# EAGLE board StepDrv1 (EAGLE 7.2.0)
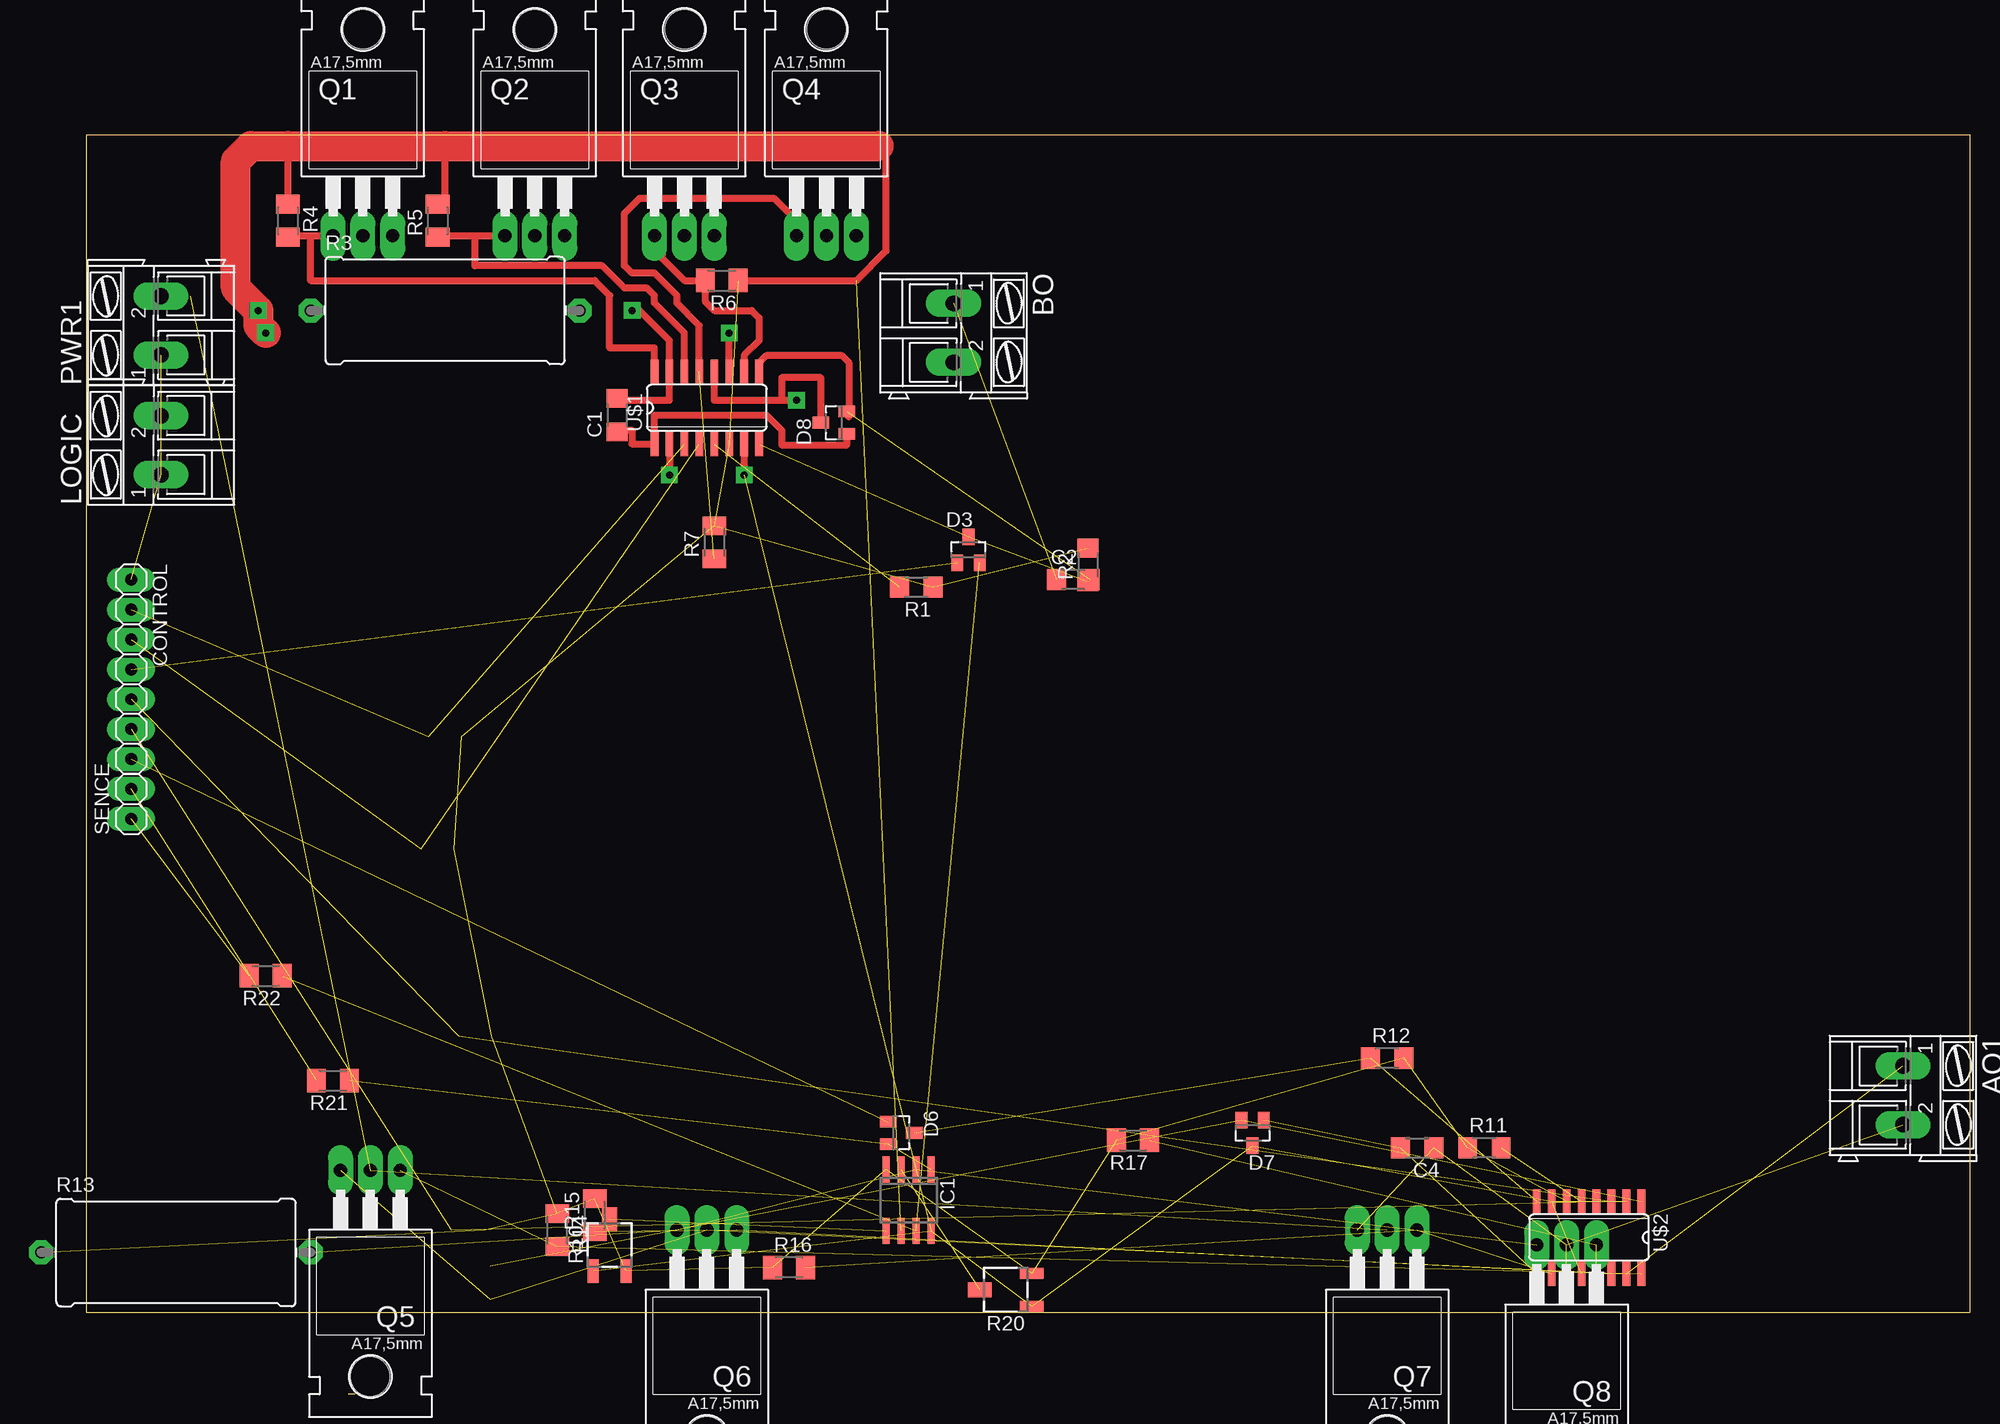
[diagram p0: board, top side]
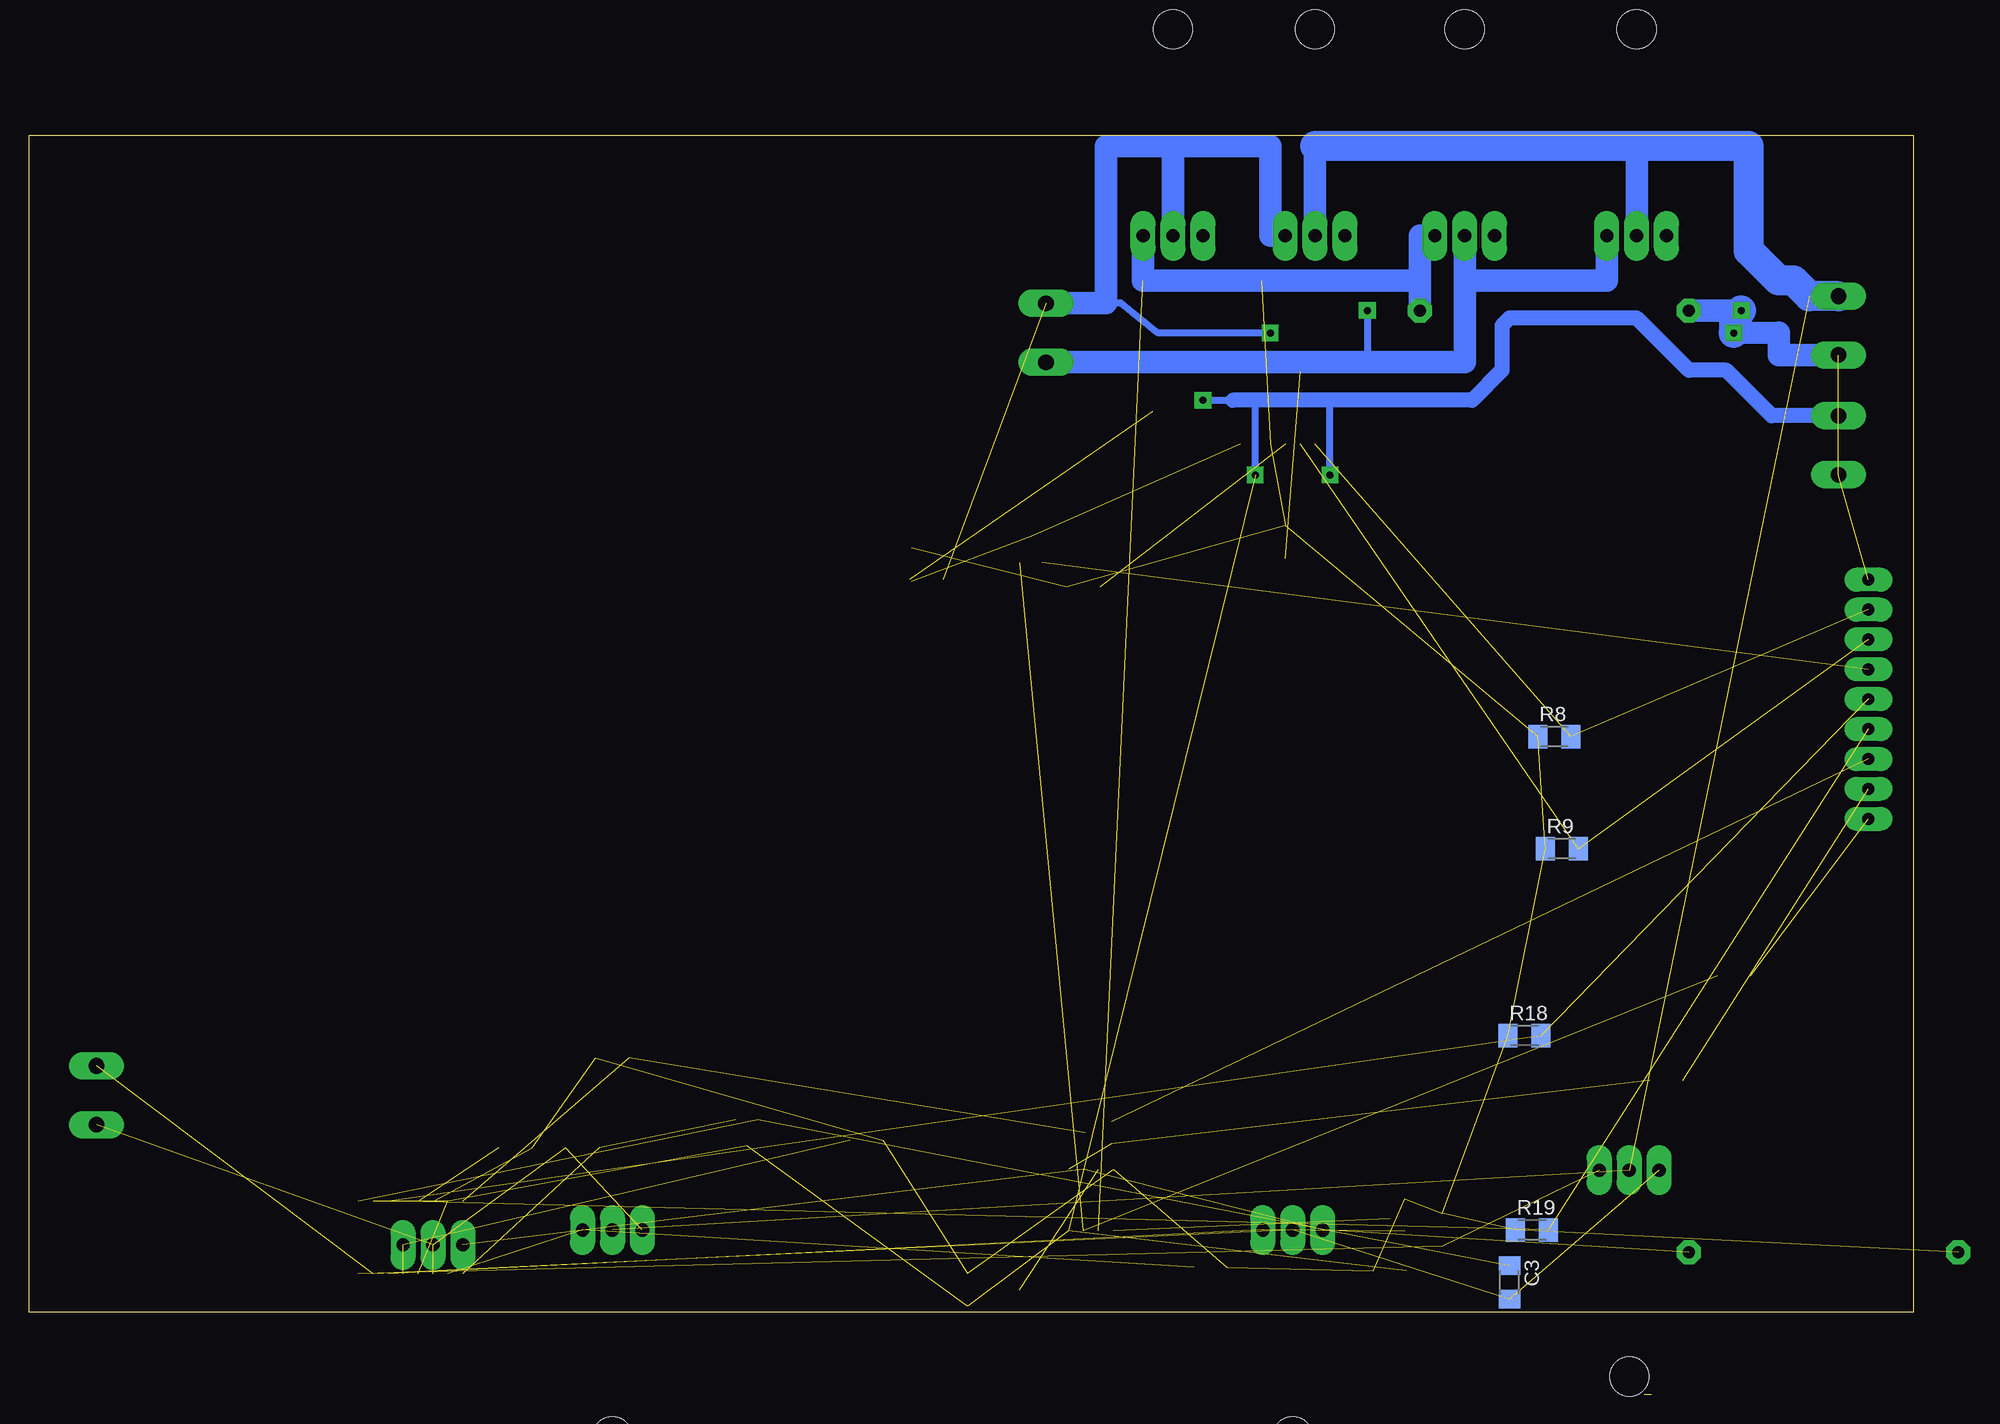
[diagram p1: board, bottom side, seen from below]

Size 160 x 106.98 mm. Coordinates in mm from the lower left corner, seen from the top.
Outline: 22.86,0 22.23,0
Outline: 0,6.99 160,6.99 160,106.98 0,106.98 0,6.99
Copper layers (1*16): Top 0.035mm / dielectric 1.5mm / Bottom 0.035mm
Design rules "default *": minimum track width 10mil, minimum drill 24mil, track to track 8mil, track to pad 8mil, pad to pad 8mil, via to via 8mil, smd to smd 8mil, copper to edge 40mil, drill to drill 8mil, minimum pad ring 20mil, minimum via ring 16mil, stop-mask expansion 4mil, vias tented up to drill 0mil, thermal gap 10mil

## Footprints (pad centres in the part's own frame; a part is rotated, then mirrored left to right if it is on the bottom)
AK300/2 = drill 1.321 long: 1 -2.515,0; 2 2.489,0
C1206 = smd 1.6 x 1.803: 1 -1.422,0; 2 1.422,0
1X07 = drill 1.016 long: 1 -7.62,0; 2 -5.08,0; 3 -2.54,0; 4 0,0; 5 2.54,0; 6 5.08,0; 7 7.62,0
SOT23 = smd 1 x 1.4: 1 -0.95,-1.1; 2 0.95,-1.1; 3 0,1.1
SO08 = smd 0.6 x 2.2: 1 -1.905,-2.6; 2 -0.635,-2.6; 3 0.635,-2.6; 4 1.905,-2.6; 5 1.905,2.6; 6 0.635,2.6; 7 -0.635,2.6; 8 -1.905,2.6
TO220BH = drill 1.118 long: D 0,-6.35; G -2.54,-6.35; S 2.54,-6.35 | hole 3.302: 0,11.176
R1206 = smd 1.6 x 1.803: 1 -1.422,0; 2 1.422,0
0922/22 = drill 1.016 octagon: 1 -11.43,0; 2 11.43,0
M1206 = smd 1.6 x 2: 1 -1.4,0; 2 1.4,0
3223G = smd 2 x 0.9: 1 -2.2,1.4; 3 -2.2,-1.4 | smd 2 x 1.3: 2 2.2,0
1X02 = drill 1.016 long: 1 -1.27,0; 2 1.27,0
SO16 = smd 0.66 x 2.032: 1 -4.445,-3.073; 2 -3.175,-3.073; 3 -1.905,-3.073; 4 -0.635,-3.073; 5 0.635,-3.073; 6 1.905,-3.073; 7 3.175,-3.073; 8 4.445,-3.073; 9 4.445,3.073; 10 3.175,3.073; 11 1.905,3.073; 12 0.635,3.073; 13 -0.635,3.073; 14 -1.905,3.073; 15 -3.175,3.073; 16 -4.445,3.073

## Placement (x,y rotation side)
AO1  OUT  [AK300/2]  154.31,25.4 270 top
BO  OUT  [AK300/2]  73.66,90.17 270 top
C1  2.2uF  [C1206]  45.09,83.19 90 top
C2  2.2uF  [C1206]  83.82,69.22 0 top
C3  2.2uF  [C1206]  34.29,9.53 270 bottom
C4  2.2uF  [C1206]  113.03,20.96 180 top
CONTROL  [1X07]  3.81,61.59 270 top
D3  HSMS-2854  [SOT23]  74.93,71.75 0 top
D6  HSMS-2854  [SOT23]  69.22,22.23 270 top
D7  HSMS-2853  [SOT23]  99.06,22.23 180 top
D8  HSMS-2853  [SOT23]  63.5,82.55 90 top
IC1  LM358D  [SO08]  69.85,16.51 180 top
LOGIC  12V  [AK300/2]  6.35,80.64 90 top
PWR1  [AK300/2]  6.35,90.8 90 top
Q1  IRFZ48Z  [TO220BH]  23.5,104.78 0 top
Q2  IRFZ48Z  [TO220BH]  38.1,104.78 0 top
Q3  IRFZ48Z  [TO220BH]  50.8,104.78 0 top
Q4  IRFZ48Z  [TO220BH]  62.87,104.78 0 top
Q5  IRFZ48Z  [TO220BH]  24.13,12.7 180 top
Q6  IRFZ48Z  [TO220BH]  52.7,7.62 180 top
Q7  IRFZ48Z  [TO220BH]  110.49,7.62 180 top
Q8  IRFZ48Z  [TO220BH]  125.73,6.35 180 top
R1  [R1206]  70.48,68.58 180 top
R2  [R1206]  85.09,70.48 90 top
R3  [0922/22]  30.48,92.08 0 top
R4  [M1206]  17.14,99.69 270 top
R5  [M1206]  29.84,99.69 90 top
R6  [M1206]  53.98,94.61 180 top
R7  [M1206]  53.34,72.39 90 top
R8  [M1206]  30.48,55.88 0 bottom
R9  [M1206]  29.84,46.35 0 bottom
R10  [3223G]  44.45,12.7 90 top
R11  [R1206]  118.75,20.96 0 top
R12  [R1206]  110.49,28.57 0 top
R13  [0922/22]  7.62,12.07 0 top
R14  [M1206]  40.01,13.97 270 top
R15  [M1206]  43.18,15.24 90 top
R16  [M1206]  59.69,10.79 0 top
R17  [M1206]  88.9,21.59 180 top
R18  [M1206]  33.02,30.48 0 bottom
R19  [M1206]  32.38,13.97 0 bottom
R20  [3223G]  78.11,8.89 180 top
R21  [M1206]  20.95,26.67 180 top
R22  [M1206]  15.24,35.56 180 top
SENCE  [1X02]  3.81,50.16 90 top
U$1  HIP4082IBZT  [SO16]  52.7,83.82 0 top
U$2  HIP4082IBZT  [SO16]  127.64,13.34 180 top

## Library data of the parts
AO1 BO LOGIC PWR1 = con-ptr500; OC_FARNELL: unknown; OC_NEWARK: unknown
C1-C4 = dp_devices
CONTROL SENCE = pinhead
D3 D6-D8 = avago
IC1 = linear
Q1-Q8 = transistor-power
R1-R9 R11-R19 R21 R22 = rcl
R10 R20 = pot
U$1 U$2 = mosfet_drivers

## Nets
N$1: C2.2 D8.2 U$1.9
N$2: D3.3 R2.1 U$1.8
N$3: C1.1 D8.1 U$1.1
N$4: BO.2 C1.2 Q1.S Q2.D U$1.15
N$5: CONTROL.4 D3.1
N$6: R1.2 U$1.5
N$7: R21.2 SENCE.2
N$8: BO.1 C2.1 Q3.S Q4.D U$1.11
N$9: CONTROL.3 R9.2 U$1.4
N$10: CONTROL.2 R8.2 U$1.3
N$11: IC1.6 Q2.S Q4.S R3.2
N$12: Q1.G R4.2 U$1.16
N$13: Q2.G R5.1 U$1.14
N$14: Q3.G R6.2 U$1.10
N$15: Q4.G R7.1 U$1.13
N$16: D3.2 IC1.7 R22.1
N$18: IC1.5 R10.2
N$19: C4.2 D7.1 U$2.9
N$20: C3.1 D7.2 U$2.1
N$21: AO1.1 C3.2 Q5.S Q6.D U$2.15
N$23: CONTROL.7 D6.1
N$24: R11.2 U$2.5
N$25: AO1.2 C4.1 Q7.S Q8.D U$2.11
N$26: IC1.2 Q6.S Q8.S R13.2
N$27: Q5.G R14.2 U$2.16
N$28: Q6.G R15.1 U$2.14
N$29: Q7.G R16.2 U$2.10
N$30: Q8.G R17.1 U$2.13
N$31: CONTROL.6 R19.2 U$2.4
N$32: CONTROL.5 R18.2 U$2.3
N$33: R22.2 SENCE.1
N$34: D6.3 R12.1 U$2.8
N$35: D6.2 IC1.1 R21.1
N$36: IC1.3 R20.2
N$37: PWR1.2 Q1.D Q3.D Q5.D Q7.D
N$38: CONTROL.1 IC1.4 LOGIC.1 PWR1.1 R1.1 R2.2 R3.1 R4.1 R5.2 R6.1 R7.2 R8.1 R9.1 R10.3 R11.1 R12.2 R13.1 R14.1 R15.2 R16.1 R17.2 R18.1 R19.1 R20.3 U$1.6 U$2.6
N$39: D7.3 D8.3 IC1.8 LOGIC.2 R10.1 R20.1 U$1.2 U$1.7 U$1.12 U$2.2 U$2.7 U$2.12

## Tracks (layer width: path | path; a pad name or v marks a point on that pad's centre or on a via)
N$1  (1 unrouted)
  Top 0.61: U$1.9 57.15,87.63 57.78,88.27 64.14,88.27 64.77,87.63 64.77,83.03 D8.2
N$2  (2 unrouted)
N$3
  Top 0.61: C1.1 45.09,81.92 46.35,81.92 46.35,80.75 U$1.1 48.26,83.19 57.78,83.19 59.05,81.92 59.05,80.64 64.6,80.64 D8.1
N$4  (via drill 0.6)
  Top 0.61: v46.35,92.08 46.99,92.08 49.53,89.53 U$1.15 49.53,84.45 45.09,84.45 C1.2
  Bottom 0.61: v46.35,92.08 46.35,87.68
  Bottom 1.93: BO.2 46.35,87.68 38.1,87.68 38.1,94.61 | 38.1,94.61 26.04,94.61 Q1.S | Q2.D 38.1,94.61
N$5  (1 unrouted)
N$6  (1 unrouted)
N$7  (1 unrouted)
N$8  (via drill 0.6)  (1 unrouted)
  Top 0.61: U$1.11 v54.61,90.17
  Bottom 0.61: v54.61,90.17 64.14,90.17 67.31,92.71 68.58,92.71
  Bottom 1.93: BO.1 68.58,92.71 68.58,106.05 62.87,106.05 | 62.87,106.05 54.61,106.05 54.61,98.42 Q3.S | Q4.D 62.87,106.05
N$9  (2 unrouted)
N$10  (2 unrouted)
N$11  (1 unrouted)
  Bottom 1.93: Q4.S 65.41,94.61 41.91,94.61 | 41.91,94.61 41.91,98.42 Q2.S | R3.2 41.91,94.61
N$12
  Top 0.61: R4.2 17.14,98.42 19.05,98.42 | 19.05,98.42 Q1.G | 19.05,98.42 19.05,94.61 43.18,94.61 44.45,93.34 44.45,88.9 48.26,88.9 U$1.16
N$13
  Top 0.61: R5.1 29.84,98.42 33.02,98.42 | 33.02,98.42 Q2.G | 33.02,98.42 33.02,95.89 43.81,95.89 45.72,93.98 47.62,93.98 48.26,93.34 48.26,92.71 50.8,90.17 U$1.14
N$14
  Top 0.61: Q3.G 48.9,97.79 48.9,96.52 50.8,94.61 R6.2 52.58,92.84 53.34,92.08 56.52,92.08 57.15,91.44 57.15,89.53 55.88,88.27 U$1.10
N$15  (1 unrouted)
  Top 0.61: U$1.13 52.07,90.8 50.16,92.71 50.16,93.34 48.26,95.25 46.35,95.25 45.72,95.89 45.72,100.33 46.99,101.6 58.42,101.6 60.33,99.69 Q4.G
N$16  (2 unrouted)
N$18  (1 unrouted)
N$19  (2 unrouted)
N$20  (2 unrouted)
N$21  (4 unrouted)
N$23  (1 unrouted)
N$24  (1 unrouted)
N$25  (4 unrouted)
N$26  (3 unrouted)
N$27  (2 unrouted)
N$28  (2 unrouted)
N$29  (2 unrouted)
N$30  (2 unrouted)
N$31  (2 unrouted)
N$32  (2 unrouted)
N$33  (1 unrouted)
N$34  (2 unrouted)
N$35  (2 unrouted)
N$36  (1 unrouted)
N$37  (2 unrouted)
  Bottom 1.93: 50.8,106.05 Q3.D | Q1.D 23.5,106.05 22.86,106.05
  Bottom 2.54: PWR1.2 8.84,93.29 10.16,94.61 11.43,94.61 13.97,97.16 13.97,106.05 22.86,106.05 50.8,106.05
N$38  (via drill 0.6)  (21 unrouted)
  Top 0.61: 17.14,100.97 R4.1 17.14,106.05 | R5.2 30.48,101.73 30.48,106.05 | R6.1 65.41,94.61 67.94,97.16 67.94,105.41 67.31,106.05
  Top 2.54: 67.31,106.05 30.48,106.05 17.14,106.05 13.97,106.05 12.7,104.78 12.7,93.98 v14.61,92.08 14.61,90.8 v15.24,90.17
  Bottom 1.93: R3.1 15.24,92.08 v15.24,90.17 11.43,90.19 11.43,88.27 PWR1.1
  Bottom 2.54: v14.61,92.08 15.24,91.44 v15.24,90.17
N$39  (via drill 0.6)  (7 unrouted)
  Top 0.61: U$1.12 53.34,84.45 59.05,84.45 | 59.05,84.45 v60.33,84.45 | U$1.7 v55.88,78.11 | U$1.2 v49.53,78.11 | D8.3 62.4,86.36 59.05,86.36 59.05,84.45
  Bottom 0.61: v60.33,84.45 57.78,84.45 | v55.88,78.11 55.88,84.45 | v49.53,78.11 49.53,84.45
  Bottom 1.27: LOGIC.2 12.01,83.13 15.88,87 19.05,87 23.5,91.44 34.29,91.44 34.92,90.8 34.92,87 37.47,84.45 49.53,84.45 55.88,84.45 57.78,84.45